# Altium PCB sft.PcbDoc
Units mil, origin at the board's own origin, x right, y up, seen from the top; angles counter-clockwise.
Board outline 825 x 740 mil, 2 copper layers (Top Layer, Bottom Layer), stack 62.8 mil thick; 16 components, 12 nets, 49 pads, 8 vias.
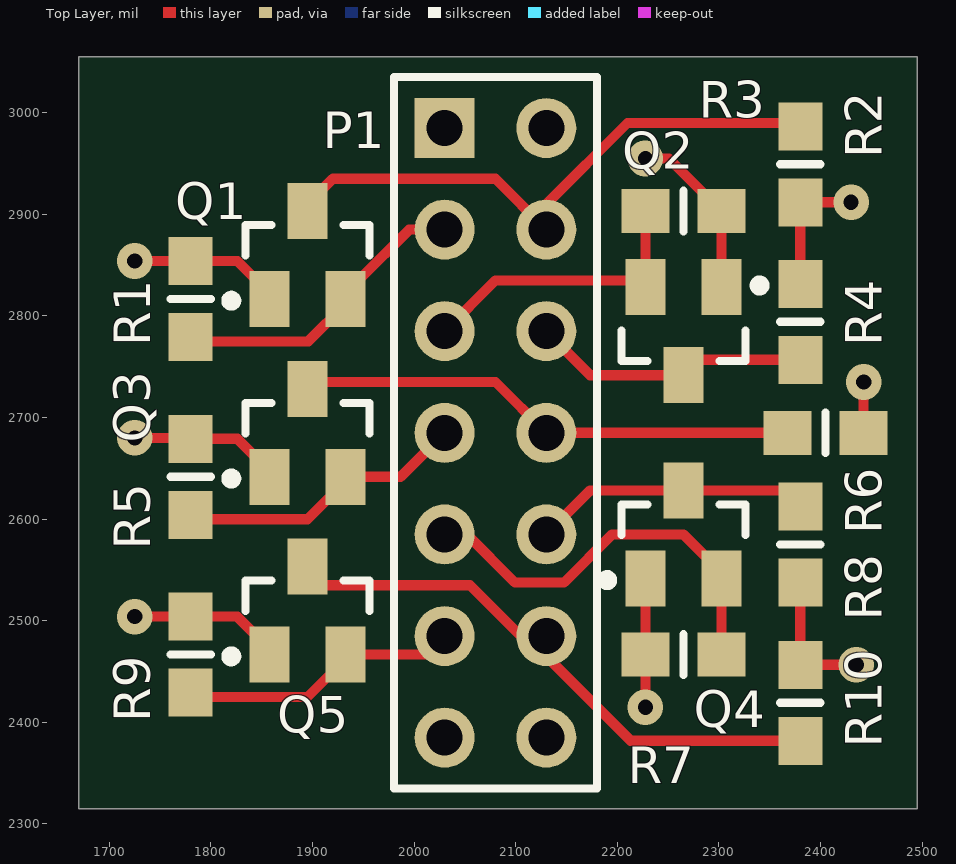
[diagram p0: Top Layer view]
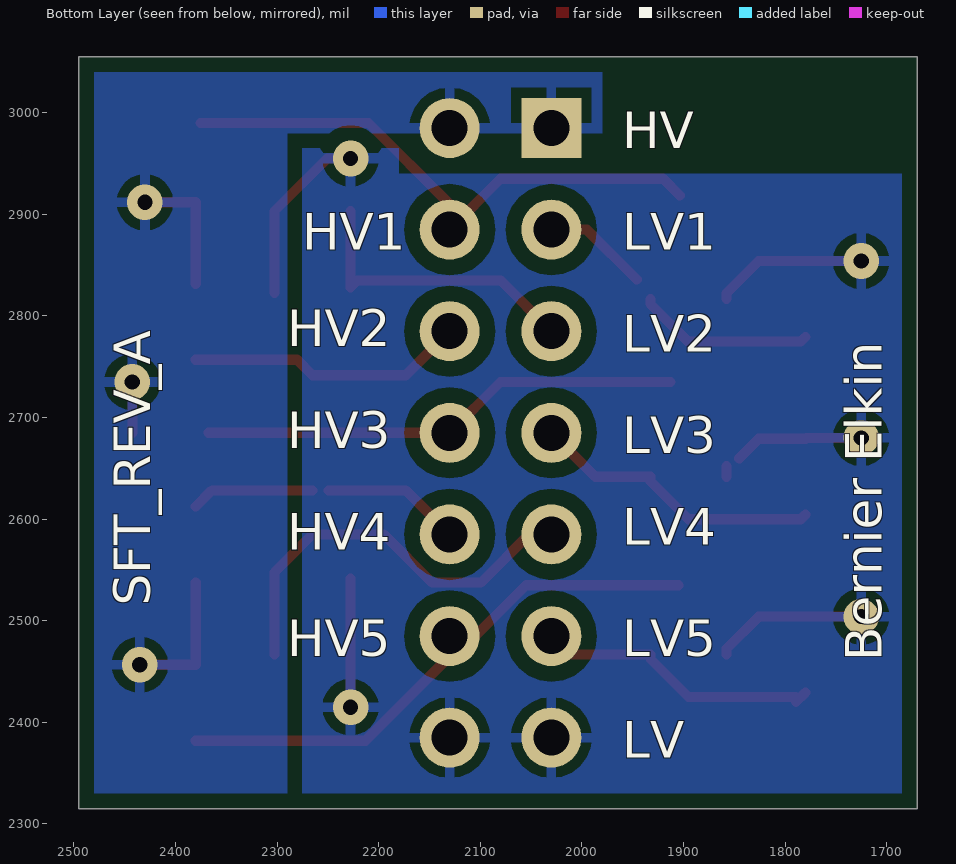
[diagram p1: Bottom Layer view, seen from below]

## Layer stack, top to bottom
Top Solder: solder mask 1, Solder Resist, Dk 3.5
Top Layer: signal copper 1.4
Dielectric 1: core 60, FR4, Dk 4.6
Bottom Layer: signal copper 1.4
Bottom Solder: solder mask 1, Solder Resist, Dk 3.5

## Board outline
1670,2315 1670,3055 2495,3055 2495,2315

## Design rules (kind name [scope] priority, off if disabled: settings)
BoardOutlineClearance [All] p1: gap=15 ignorepadtopadclearanceinfootprint=FALSE
Clearance [All] p1: gap=10 ignorepadtopadclearanceinfootprint=FALSE except(6: Track-Track Track-SMDPad SMDPad-SMDPad; 15: Track-Fill Track-Poly Track-Region SMDPad-Fill SMDPad-Poly SMDPad-Region THPad-Fill THPad-Poly THPad-Region Via-Fill Via-Poly Via-Region)
DiffPairsRouting [All] p1: maxlimit=10 minlimit=10 mostfreqgap=10 toplayer_minwidth=10 toplayer_maxwidth=15 toplayer_prefwidth=10 bottomlayer_minwidth=10 bottomlayer_maxwidth=15 bottomlayer_prefwidth=10 maxuncoupledlength=500
HoleSize [All] p1: absolutevalues=TRUE maxlimit=200 minlimit=10 maxpercent=80.000 minpercent=20.000
MinimumAnnularRing [All] p1: minimumring=5
MinimumSolderMaskSliver [All] p1: minsoldermaskwidth=4
PlaneConnect [All] p1: planeconnectstyle=Direct reliefexpansion=20 reliefentries=4 reliefconductorwidth=10 reliefairgap=10
PolygonConnect [All] p1: connectstyle=Relief reliefconductorwidth=10 reliefentries=4 polygonreliefangle="90 Angle" airgapwidth=10
RoutingVias [All] p1: holewidth=6 width=16 viastyle="Through Hole" minholewidth=6 minwidth=16 maxholewidth=28 maxwidth=50
SilkToSolderMaskClearance [IsPad] p1: minsilkscreentomaskgap=6 clearancetoexposedcopper=TRUE
SolderMaskExpansion [All] p1: expansion=3
Width [All] p1: maxlimit=100 minlimit=6 preferedwidth=10 minimp=40.000000 maximp=50.000000 favimp=45.000000
25 further rules are at their usual default settings.

## Components (designator, comment, footprint, x,y, rotation, side; value= is the part's Value field where it differs from the comment)
P1 "Header 7X2" HDR2X7 2030,2985 r270 top
Q1 "BSS138" FAIR-SOT23-3_V 1895,2860 r90 top
Q2 "BSS138" FAIR-SOT23-3_V 2265,2785 r270 top
Q3 "BSS138" FAIR-SOT23-3_V 1895,2685 r90 top
Q4 "BSS138" FAIR-SOT23-3_V 2265,2585 r90 top
Q5 "BSS138" FAIR-SOT23-3_V 1895,2510 r90 top
R1 "Generic 0603 Resistor" 0603 1780,2816.69 r90 top value=10k
R2 "Generic 0603 Resistor" 0603 2380,2949.29 r270 top value=10k
R3 "Generic 0603 Resistor" 0603 2265,2903.31 r0 top value=10k
R4 "Generic 0603 Resistor" 0603 2380,2794.29 r90 top value=10k
R5 "Generic 0603 Resistor" 0603 1780,2641.69 r90 top value=10k
R6 "Generic 0603 Resistor" 0603 2405,2685 r0 top value=10k
R7 "Generic 0603 Resistor" 0603 2265,2466.69 r180 top value=10k
R8 "Generic 0603 Resistor" 0603 2380,2575 r270 top value=10k
R9 "Generic 0603 Resistor" 0603 1780,2466.69 r90 top value=10k
R10 "Generic 0603 Resistor" 0603 2380,2419.29 r90 top value=10k

## Footprints (in the part's own frame and the unit in brackets; to place one, negate y for a bottom-side part, rotate by r counter-clockwise, add the part's x,y. Pads: shape width x height; smd on the part's side, far side on the other; paste and mask are expansions set on the pad)
0603 [mm] "0603 - Based on VIshey Recommendations"
  rect 1.2x1.1 smd mask+0.1: 1(-0.95,0) 2(0.95,0)
  silkscreen extent 0,-0.51 0,0.51, body extent -0.8,-0.4 0.8,0.4, height 0.76
FAIR-SOT23-3_V [mm] "SOT23, 3-Leads, Body 3.12x1.5mm, Pitch 0.95mm"
  rect 1.4x1 smd: 1(-1.1,0.95) 2(-1.1,-0.95) 3(1.1,0)
  silkscreen extent -1.27,-1.55 0.75,2.03, body extent -1.35,-1.56 1.35,1.56, height 1.2
HDR2X7 [mm] "Connector; Header; 7x2 Position"
  rect 1.5x1.5 hole 0.9: 1(0,0)
  round 1.5 hole 0.9: 2(0,2.54) 3(2.54,0) 4(2.54,2.54) 5(5.08,0) 6(5.08,2.54) 7(7.62,0) 8(7.62,2.54) 9(10.16,0) 10(10.16,2.54) 11(12.7,0) 12(12.7,2.54) 13(15.24,0) 14(15.24,2.54)
  silkscreen extent -1.27,-1.27 16.51,3.81

## Part data
P1: "Header, 7-Pin, Dual row", LatestRevisionDate=17-Jul-2002, LatestRevisionNote="Re-released for DXP Platform.", Publisher="Altium Limited"
Q1 Q2 Q3 Q4 Q5: "N-Channel Logic Level Enhancement Mode Field Effect Transistor, 220 mA, 50 V, -55 to 150 degC, 3-Pin SOT-23, RoHS, Tape and Reel", Capacitance="1.8E-11 f", Frequency="12 MHz", Frequency Tolerance=30ppm, Load Capacitance="18 pF", Max Operating Temperature=70degC, Min Operating Temperature=-20degC, Package Quantity=1, Resistance="100 Ohm", ComponentLink1Description="Manufacturer URL", ComponentLink1URL=https://www.fairchildsemi.com/, ComponentLink2Description=Datasheet, ComponentLink2URL=https://www.fairchildsemi.com/datasheets/BS/BSS138.pdf, ComponentLink3Description="Package Specification", ComponentLink3URL=http://www.fairchildsemi.com/dwg/MA/MA03D.pdf, DatasheetVersion="Rev. C, 10/2005", ESR="40 Ohm", Height="0.041 inch", Length="0.197 inch", Mount="Surface Mount", PackageDescription="3-Pin Small Outline Transistor, Body 2.92 x 1.325 mm, Pitch 0.95 mm", PackageReference=SOT23-3, Packaging="Tape and Reel", Pins=4, REACH SVHC=Unknown, RoHSCompliant=True, Tolerance=30ppm, Width="0.126 inch"
R1 R2 R3 R4 R5 R6 R7 R8 R9 R10: library part R_0603

## Via types
v1: diameter 35, hole 15, Top Layer to Bottom Layer, tented both sides, 8 vias

## Nets (pads, with @x,y where several pads share a name; then routed paths per layer and width w, separated by ;. In a path a pad name is that pad's centre, name@x,y a point inside that pad or via, vN(x,y) a via of type N, cw(c..) or ccw(c..) an arc to the next point about the centre after c; other vN are vias at no path point)
3V3: P1.13 P1.14 Q1.1 Q2.1 Q3.1 Q4.1 Q5.1 R1.2 R3.2 R5.2 R7.2 R9.2 | length 745.5
  Top Layer w10: v1(1725,2504.09) R9.2 1825.91,2504.09 1857.6,2472.4 Q5.1 ; v1(1725,2680) 1779.09,2680 R5.2 1825.91,2679.09 Q3.1@1845,2660 ; v1(1725,2854.09) R1.2 1825.91,2854.09 1857.6,2822.4 Q1.1 ; Q3.1 Q3.1@1857.6,2652.4 ; v1(2227.6,2415) R7.2 Q4.1 ; v1(2227.6,2955) 2250.71,2955 R3.2 Q2.1 Q2.1@2302.4,2822.6
5V: P1.1 P1.2 R2.2 R4.2 R6.2 R8.2 R10.2 | length 316.1
  Top Layer w10: R8.2 R10.2 v1(2435,2456.69) ; R4.2 R2.2 v1(2430,2911.89) ; R6.2 v1(2442.4,2735)
NetP1_3: P1.3 Q1.2 R1.1 | length 278.8
  Top Layer w10: R1.1 1784.29,2775 1895.71,2775 1932.4,2811.69 Q1.2 ; Q1.2@1945.94,2835.94 1995,2885 P1.3
NetP1_4: P1.4 Q1.3 R2.1 | length 557.1
  Top Layer w10: Q1.3@1903.53,2918.53 1920,2935 2080,2935 P1.4 2130,2910 2210,2990 R2.1@2375,2990
NetP1_5: P1.5 Q2.2 R3.1 | length 296.1
  Top Layer w10: P1.5 2080,2835 2220.91,2835 Q2.2 R3.1
NetP1_6: P1.6 Q2.3 R4.1 | length 274.2
  Top Layer w10: P1.6 2173.31,2741.69 Q2.3 2280.2,2756.89 R4.1
NetP1_7: P1.7 Q3.2 R5.1 | length 289.5
  Top Layer w10: R5.1 1784.29,2600 1895,2600 1932.4,2637.4 Q3.2 1986.69,2641.69 P1.7
NetP1_8: P1.8 Q3.3 R6.1 | length 475.7
  Top Layer w10: Q3.3@1912.63,2735 2080,2735 P1.8 R6.1
NetP1_9: P1.9 Q4.2 R7.1 | length 408.1
  Top Layer w10: P1.9 2051.69,2585 2099.09,2537.6 2147.6,2537.6 2195,2585 2265,2585 2302.4,2547.6 Q4.2 R7.1
NetP1_10: P1.10 Q4.3 R8.1 | length 258.5
  Top Layer w10: P1.10 2173.31,2628.31 Q4.3@2249,2628.31 ; Q4.3 2364.09,2628.31 R8.1
NetP1_11: P1.11 Q5.2 R9.1 | length 280.5
  Top Layer w10: R9.1 R9.1@1789.29,2420 ; R9.1@1790,2425 1895,2425 1932.4,2462.4 Q5.2 2011.69,2466.69 P1.11
NetP1_12: P1.12 Q5.3 R10.1 | length 550.1
  Top Layer w10: Q5.3@1905,2535 2055,2535 2105,2485 P1.12 2130,2465 2213.11,2381.89 R10.1

## Polygon pours and split planes (outlines as drawn)
5V on Bottom Layer "Bottom Layer-5V" (solid, pour order 50): 2345,3040 1980,3040 1980,2980 2290,2980 2290,2330 2480,2330 2480,3040
3V3 on Bottom Layer "Bottom Layer-3V3" (solid, pour order 48): 1685,2940 1685,2330 2275,2330 2275,2965 2180,2965 2180,2940

## Silkscreen, mask and mechanical layers (free items; w line width, h text height)
Bottom Overlay:
  text "HV" at 1960,2965 h36
  text "LV1" at 1960,2865 h36
  text "HV1" at 2275,2865 h36
  text "HV2" at 2290,2770 h36
  text "LV2" at 1960,2765 h36
  text "HV3" at 2290,2670 h36
  text "LV3" at 1960,2665 h36
  text "LV4" at 1960,2575 h36
  text "HV4" at 2290,2570 h36
  text "SFT_REV_A" at 2425,2515 h36 r270
  text "LV5" at 1960,2465 h36
  text "HV5" at 2290,2465 h36
  text "Bernier Elkin" at 1705,2460 h36 r270
  text "LV" at 1960,2365 h36
Mechanical 1:
  the board outline again, w10